# Altium PCB Stm32f103电机驱动板.PcbDoc
Units mil, origin at the board's own origin, x right, y up, seen from the top; angles counter-clockwise.
Board outline 1995.08 x 1945.04 mil, 4 copper layers (Top Layer, GND, VCC, Bottom Layer), stack 23.756 mil thick; 45 components, 46 nets, 210 pads, 258 vias.
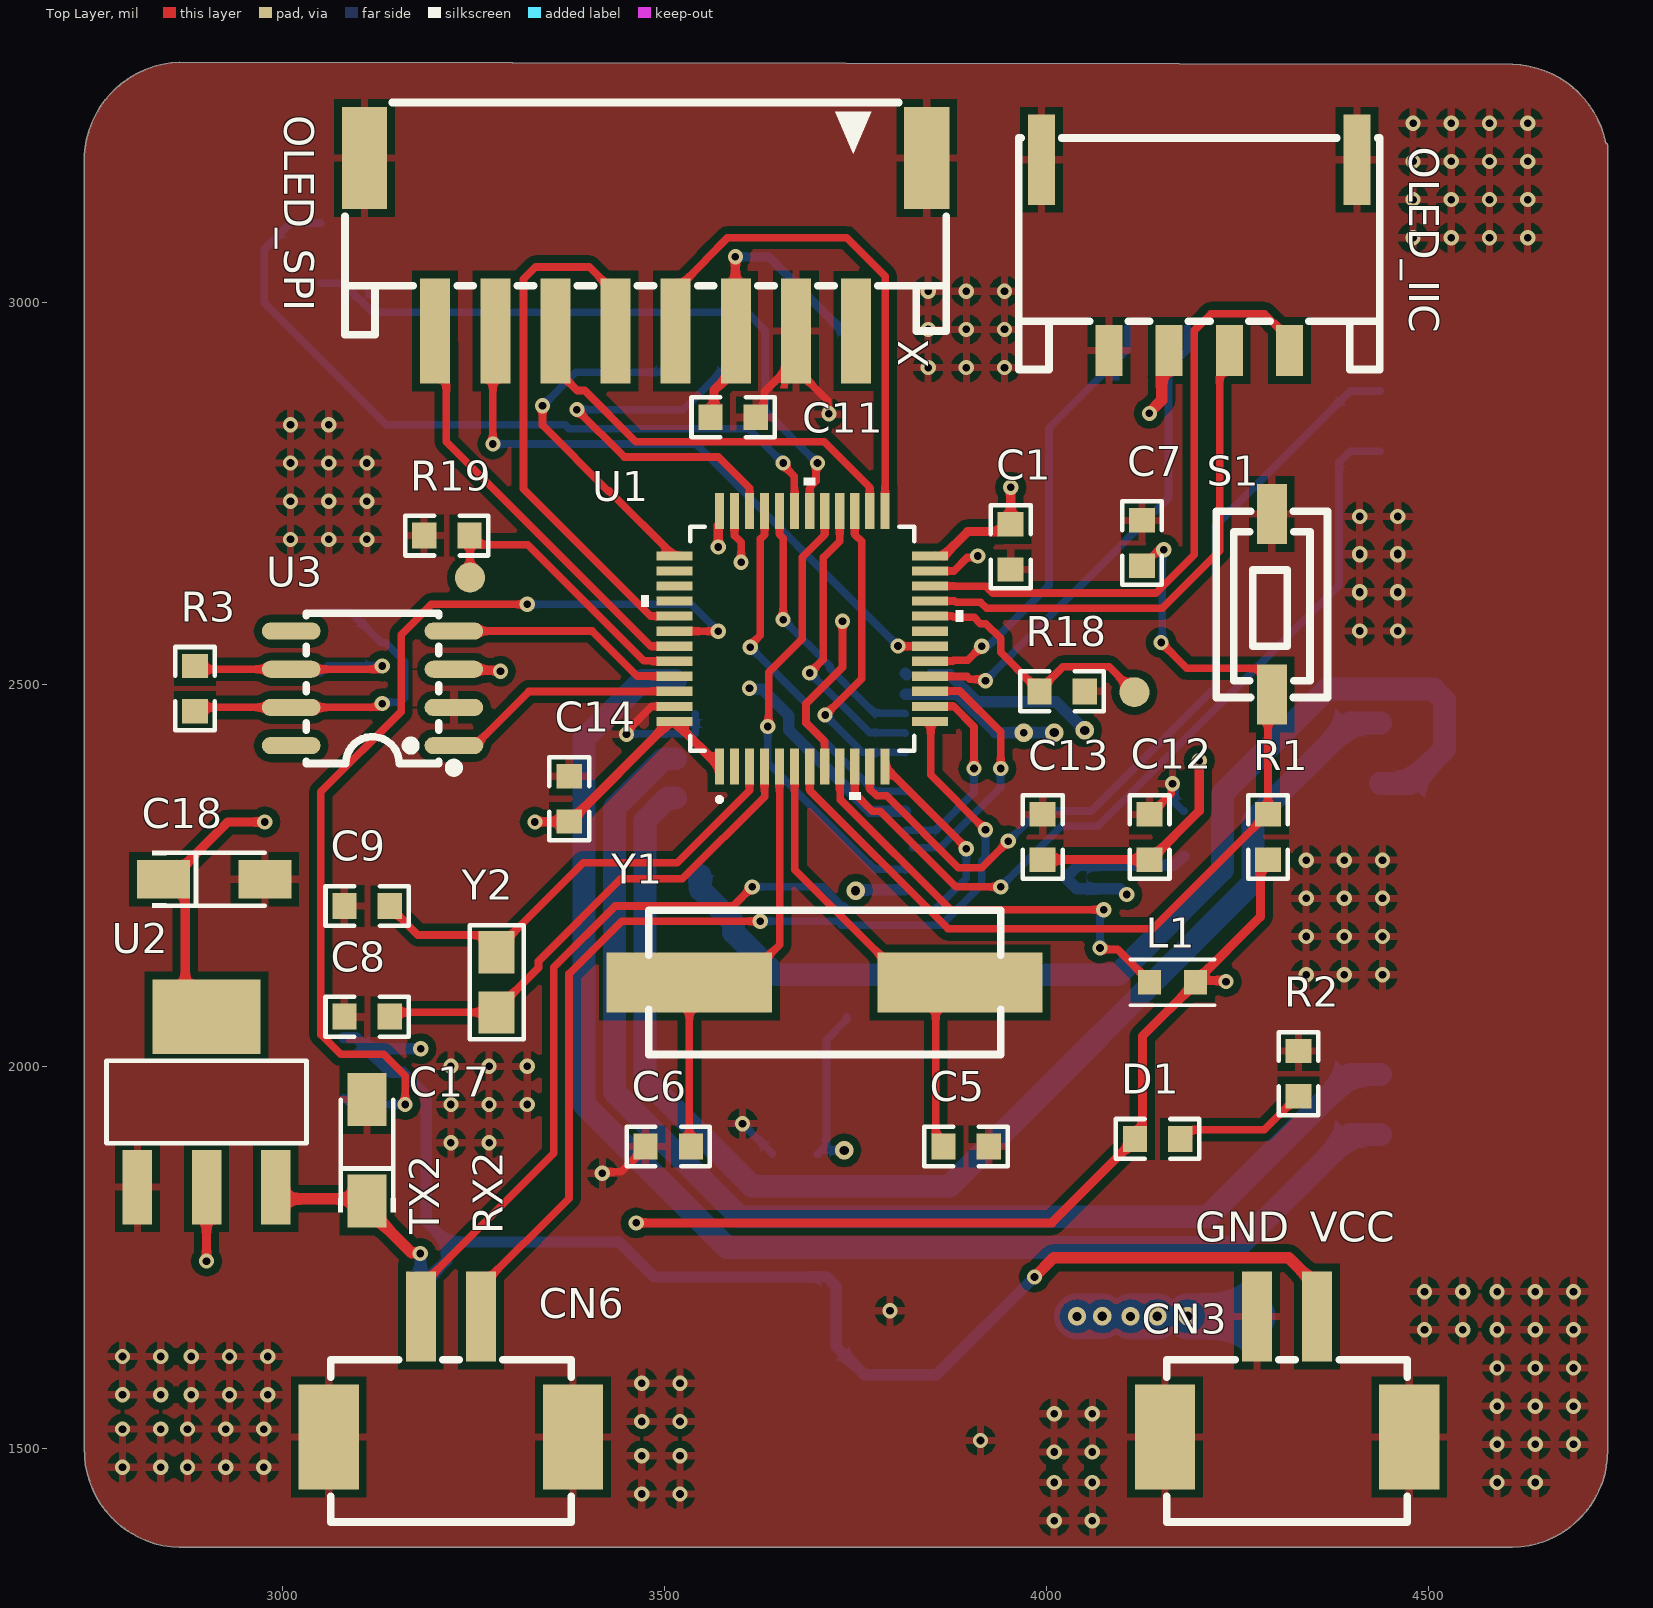
[diagram p0: Top Layer view]
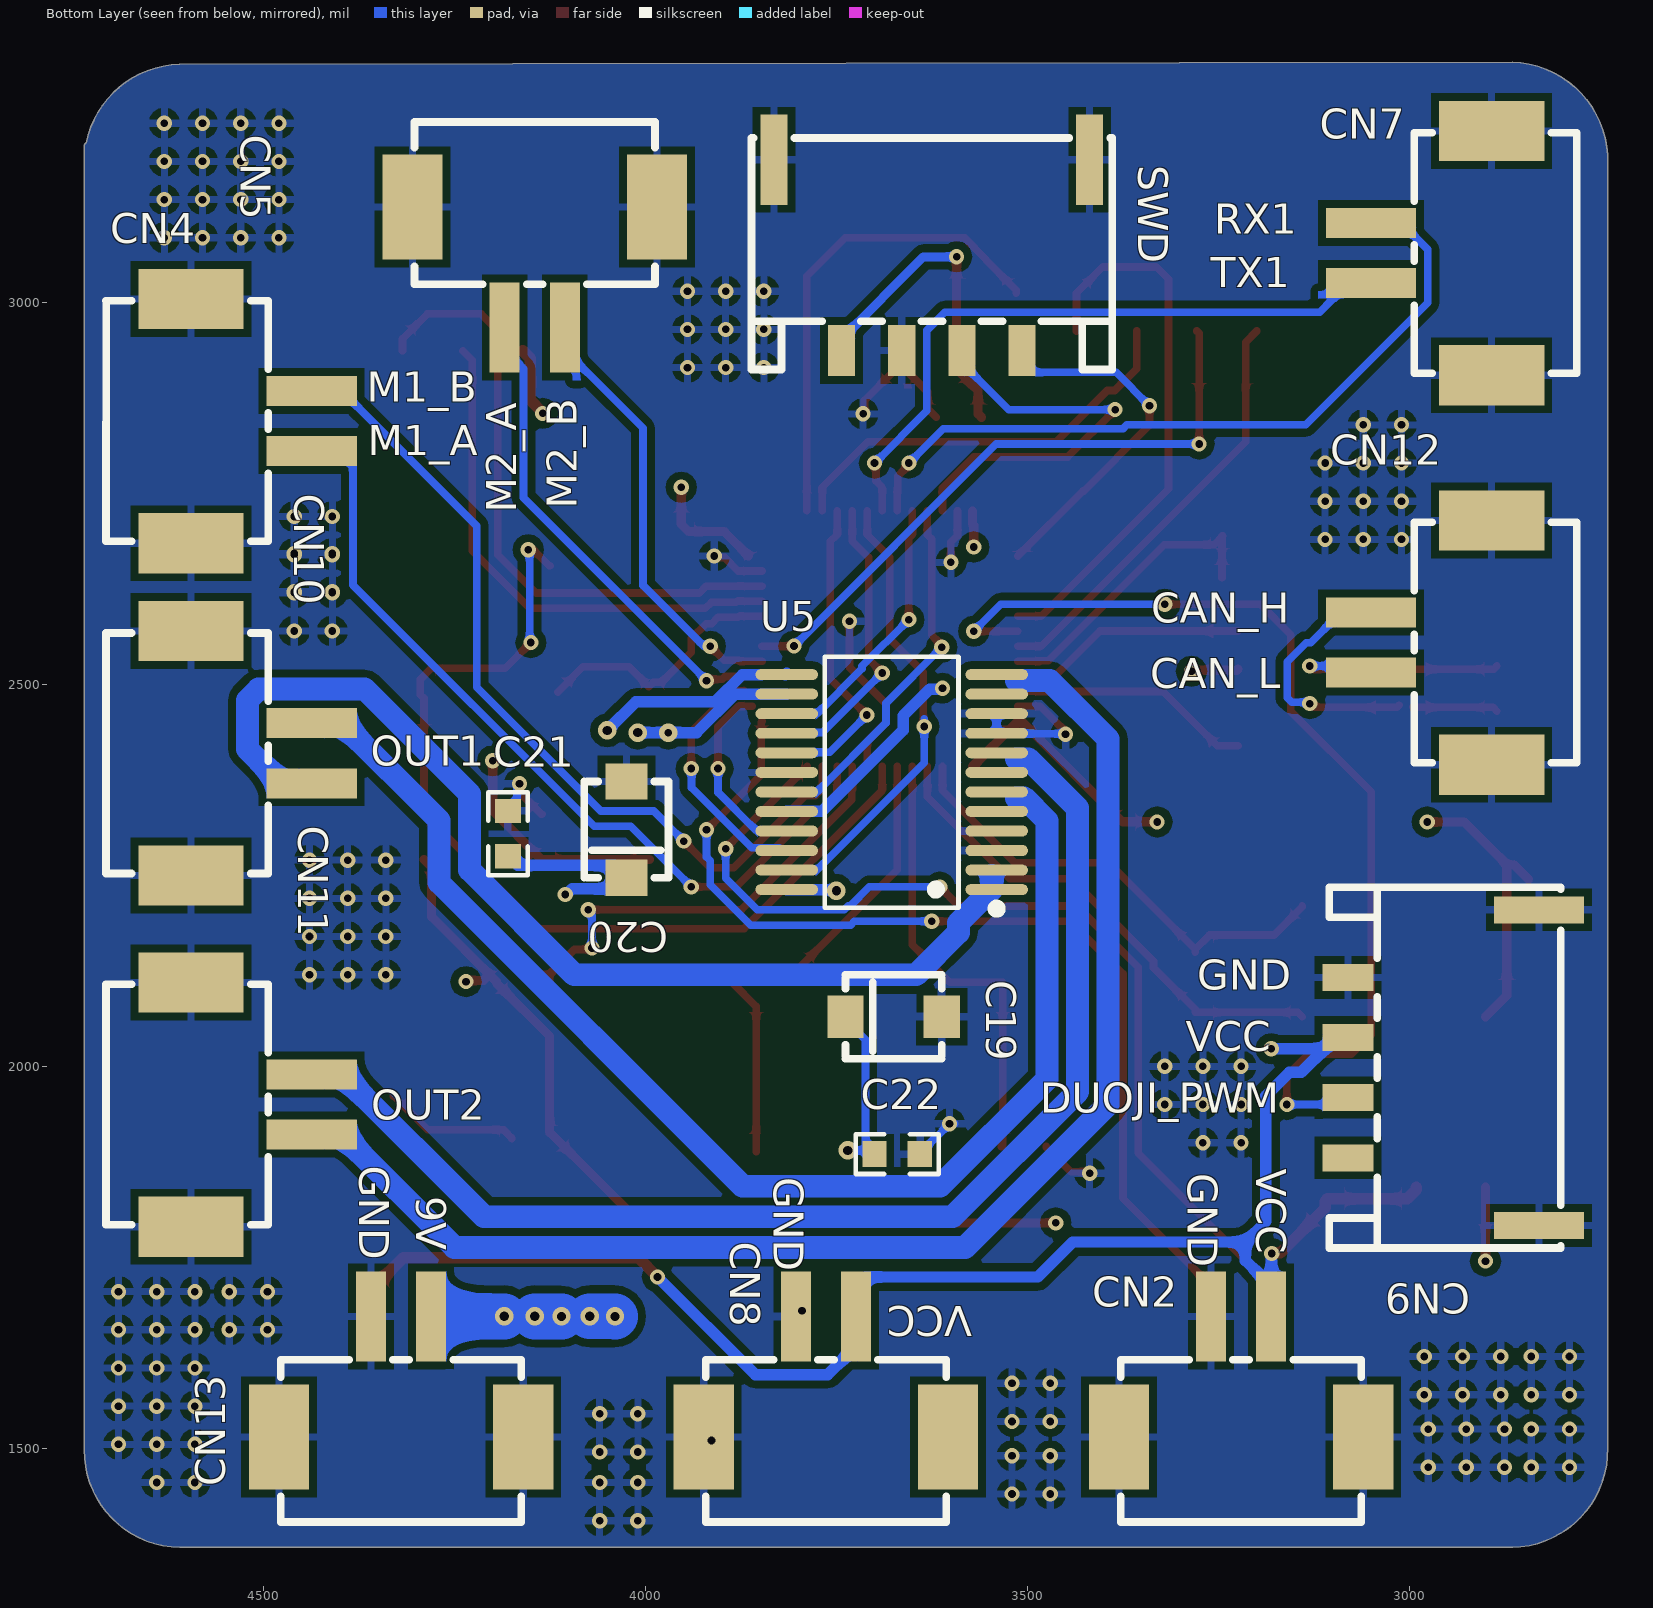
[diagram p1: Bottom Layer view, seen from below]
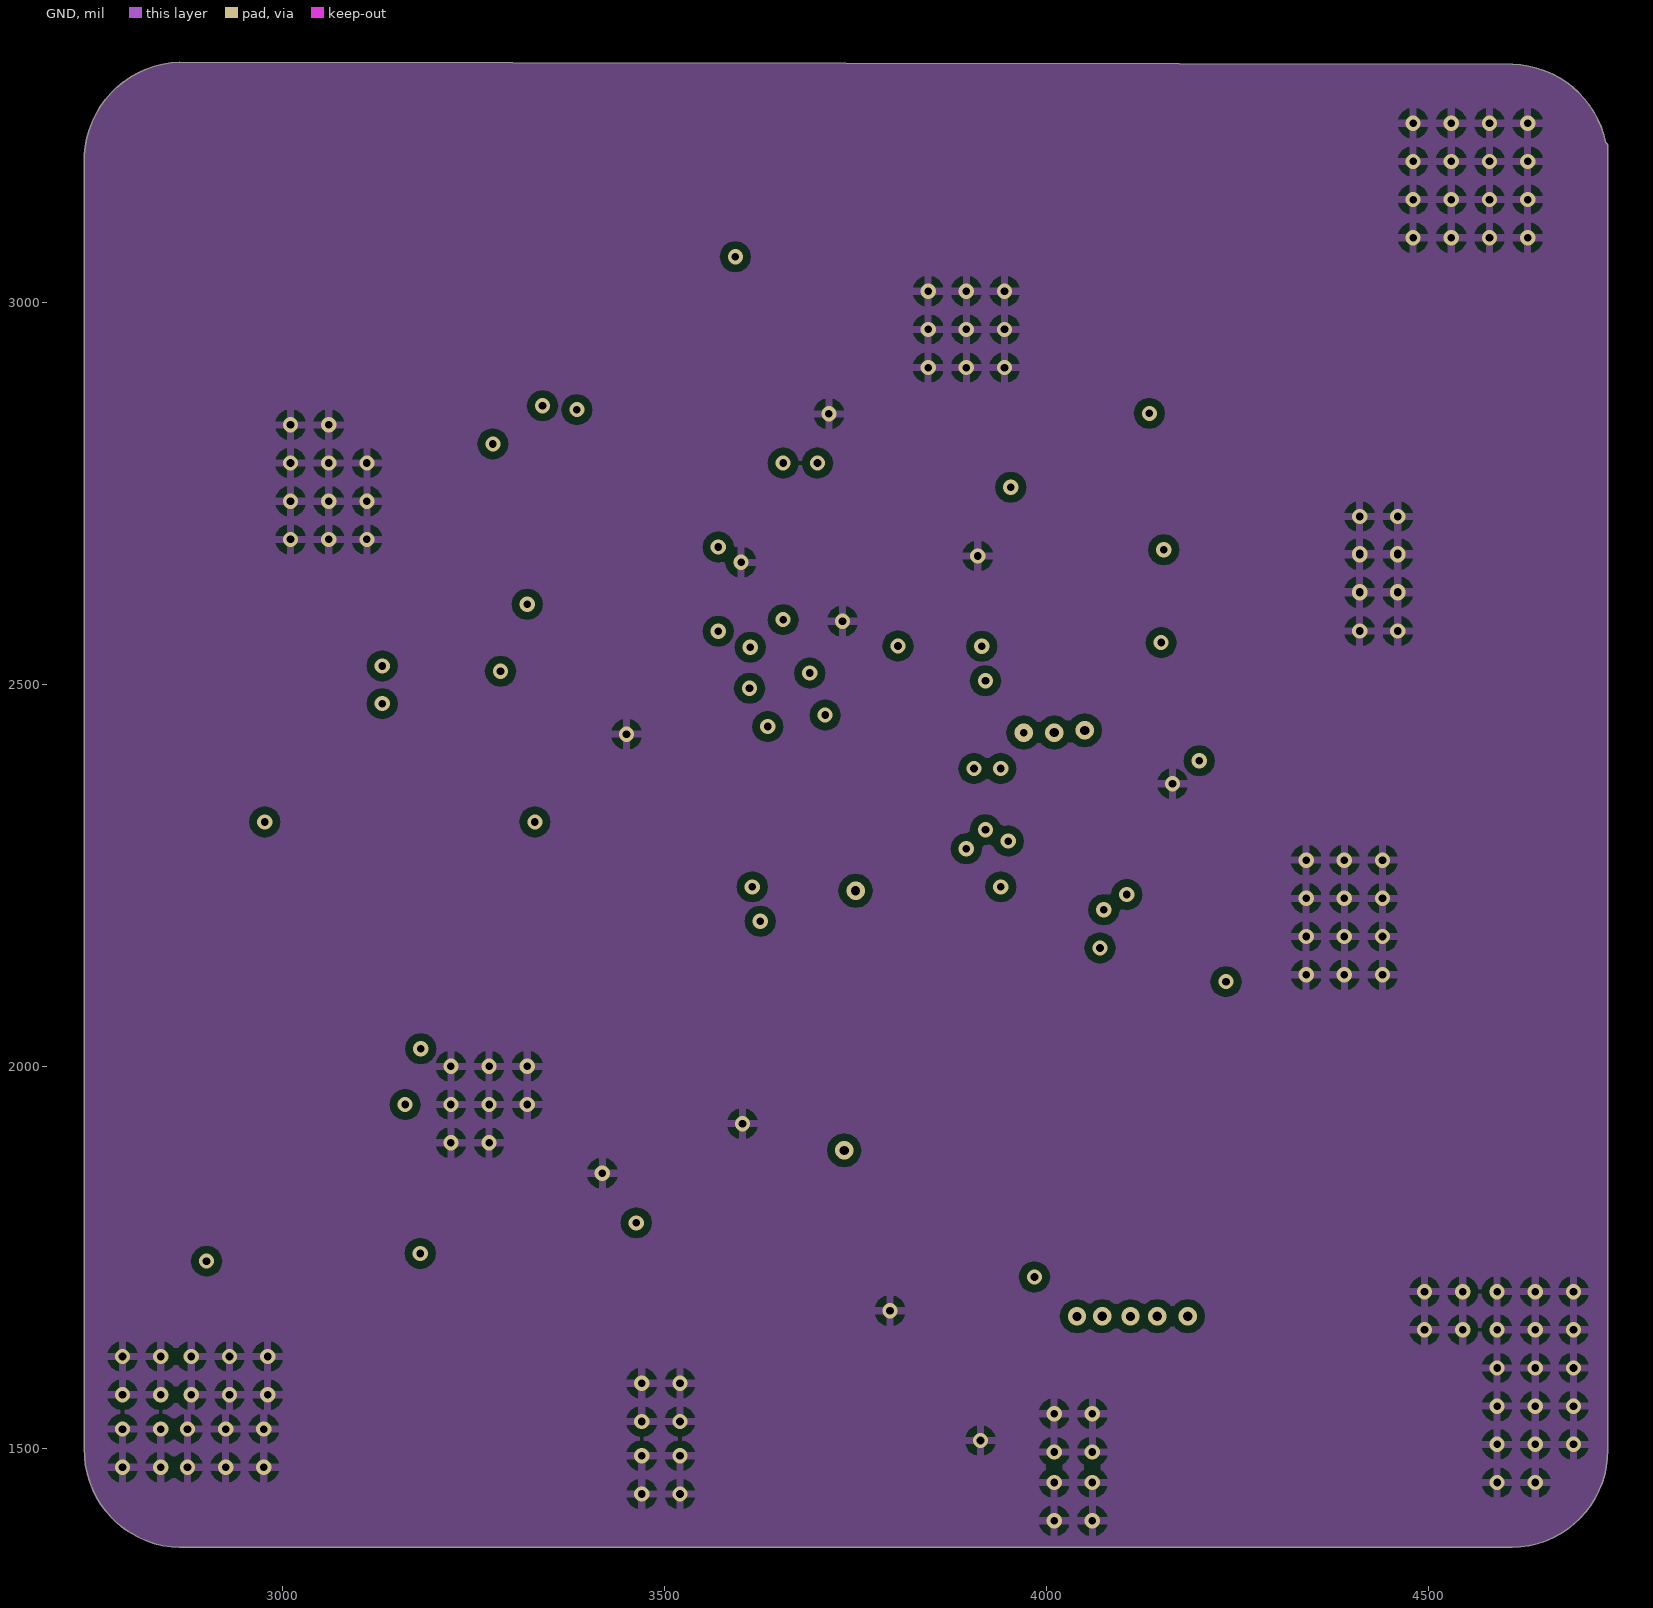
[diagram p2: GND]
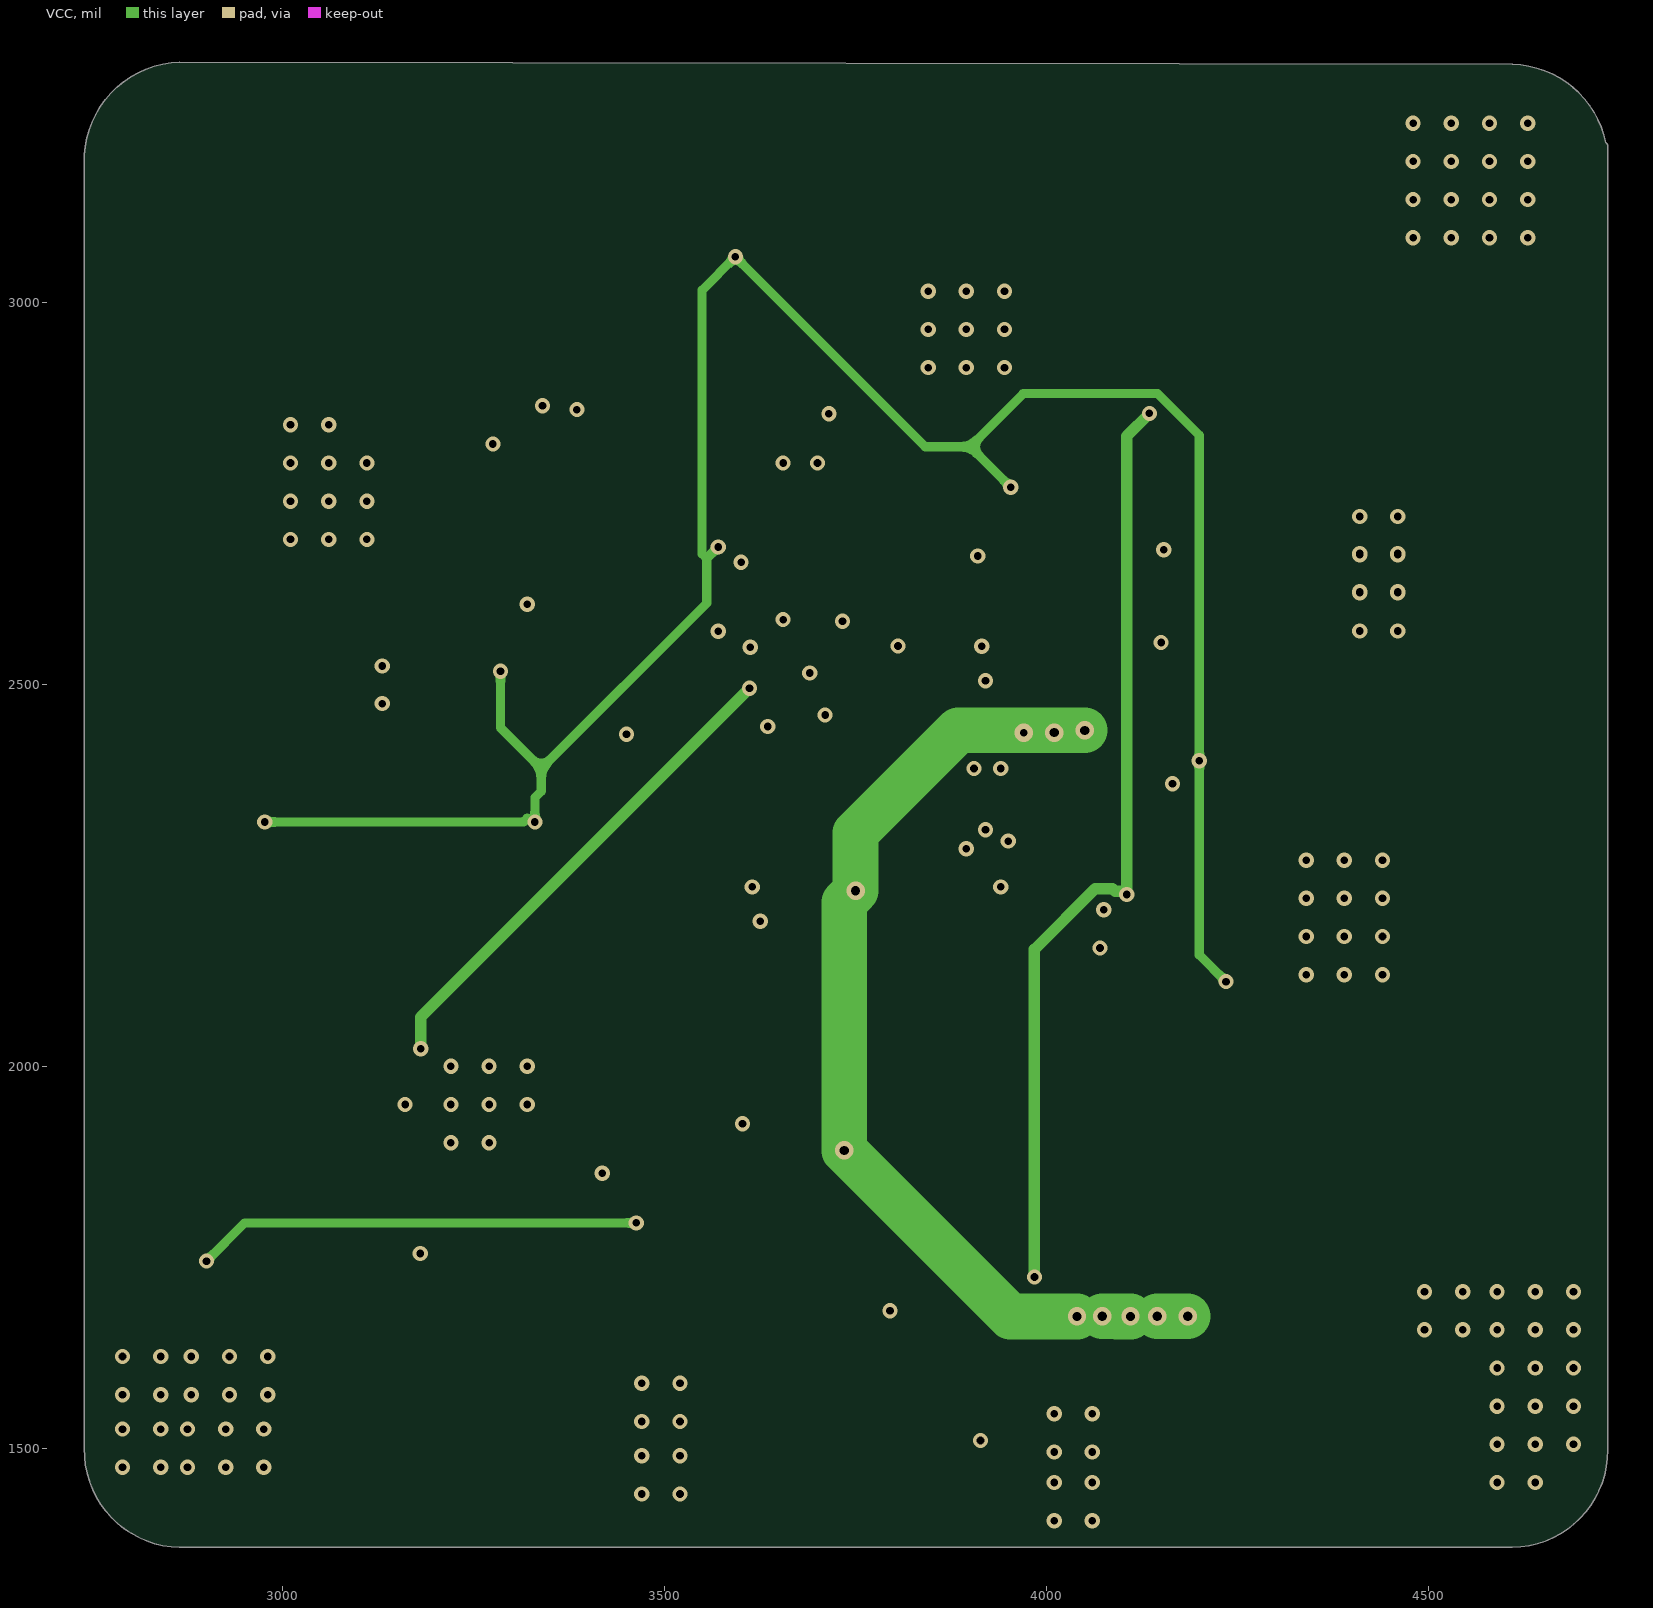
[diagram p3: VCC]

## Layer stack, top to bottom
Top Solder: solder mask 0.4, Solder Resist, Dk 3.5
Top Layer: signal copper 1.4
Dielectric 2: prepreg 2.8, PP-006, Dk 4.1
GND: signal copper 1.3779
Dielectric 1: dielectric 12.6, FR-4, Dk 4.8
VCC: signal copper 1.3779
Dielectric 3: prepreg 2.8, PP-006, Dk 4.1
Bottom Layer: signal copper 1.4
Bottom Solder: solder mask 0.4, Solder Resist, Dk 3.5

## Board outline
2739.98,1500 2739.98,1500.05 2739.99,3182.12 cw(c2868.9,3186.11) 2864.84,3315.02 cw(c2865,3310.01) 2865.04,3315.02 4610,3312.18 cw(c4609.99,3307.17) 4610.13,3312.18 cw(c4606.41,3183.58) 4732.45,3209.37 cw(c4730,3205) 4735.02,3205 4735.02,3187.23 cw(c4606.41,3183.58) 4735.07,3183.58 cw(c4606.41,3183.58) 4735.02,3179.93 4735.02,1500.05 cw(c4607.5,1497.5) 4735.04,1497.5 cw(c4607.5,1497.5) 4610.1,1369.99 cw(c4610,1375) 4610,1369.98 2865.03,1369.98 cw(c2865,1375) 2864.9,1369.99 cw(c2867.5,1497.5) 2739.98,1500.05 cw(c2867.5,1497.5)

## Design rules (kind name [scope] priority, off if disabled: settings)
Clearance [All] p1: gap=10 ignorepadtopadclearanceinfootprint=FALSE except(0: Arc-Hole Track-Hole SMDPad-Hole THPad-Hole Via-Hole Fill-Hole Poly-Hole Region-Hole Text-Hole)
PolygonConnect [All] p1: connectstyle=Relief reliefconductorwidth=10 reliefentries=4 polygonreliefangle="90 Angle" airgapwidth=10
RoutingVias [All] p1: holewidth=10 width=20 viastyle="Through Hole" minholewidth=10 minwidth=20 maxholewidth=28 maxwidth=50
SolderMaskExpansion [All] p1: expansion=4
Width [All] p1: maxlimit=80 minlimit=8 preferedwidth=10
30 further rules are at their usual default settings.

## Classes and differential pairs
component class 外围接口: CN2 CN3 CN4 CN5 CN6 CN7 CN8 CN9 CN10 CN11 CN12 CN13 OLED_IIC SWD
component class 主控: C1 C5 C6 C7 C8 C9 C11 C12 C13 C14 C17 C18 C19 C20 C21 C22 D1 L1 OLED_SPI R1 R2 R3 R18 R19 S1 U1 U2 U3 U5 Y1 Y2

## Components (designator, comment, footprint, x,y, rotation, side; value= is the part's Value field where it differs from the comment)
C1 "Cap" R0603 3947.18,2644.33 r90 top value=100nF
C5 "Cap" R0603 3930.67,1889.13 r180 top value=20pF
C6 "Cap" R0603 3468.64,1900.87 r0 top value=20pF
C7 "Cap" R0603 4130.87,2721.36 r270 top value=10uF
C8 "Cap" R0603 3074.33,2070.87 r0 top value=10pF
C9 "Cap" R0603 3074.33,2215.87 r0 top value=10pF
C11 "Cap" R0603 3625.67,2844.13 r180 top value=100nF
C12 "Cap" R0603 4140.87,2336.36 r270 top value=4.7uF
C13 "Cap" R0603 4000.87,2336.36 r270 top value=100nF
C14 "Cap" R0603 3380.87,2386.36 r270 top value=100nF
C17 "Cap Pol1" CAP-SMD_L3.2-W1.6-RD 3110,1890 r270 top value=10UF
C18 "Cap Pol1" CAP-SMD_L3.2-W1.6-RD 2910,2245 r180 top value=10UF
C19 "Cap" CAP-SMD_L3.2-W2.8 3675,2065 r180 bottom value=10uF
C20 "Cap" CAP-SMD_L3.2-W2.8 4025,2310 r90 bottom value=10uF
C21 "Cap" R0603 4185.87,2268.64 r90 bottom value=0.1uF
C22 "Cap" R0603 3706.36,1890.87 r180 bottom value=0.1uF
CN2 "PH2.0-2P" CONN-SMD_PH2.0-1X2PW 3220,1565 r0 bottom
CN3 "PH2.0-2P" CONN-SMD_PH2.0-1X2PW 4315,1565 r180 top
CN4 "PH2.0-2P" CONN-SMD_PH2.0-1X2PW 4544.68,2845 r90 bottom
CN5 "PH2.0-2P" CONN-SMD_PH2.0-1X2PW 4145,3075 r180 bottom
CN6 "PH2.0-2P" CONN-SMD_PH2.0-1X2PW 3220,1565 r180 top
CN7 "PH2.0-2P" CONN-SMD_PH2.0-1X2PW 2942.2,3065 r270 bottom
CN8 "PH2.0-2P" CONN-SMD_PH2.0-1X2PW 3763.7,1565 r0 bottom
CN9 "PH2.0-4PWB卧式" CONN-SMD_PH2.0-4PWB 2942.2,1998.31 r270 bottom
CN10 "PH2.0-2P" CONN-SMD_PH2.0-1X2PW 4544.69,2410 r90 bottom
CN11 "PH2.0-2P" CONN-SMD_PH2.0-1X2PW 4544.69,1950 r90 bottom
CN12 "PH2.0-2P" CONN-SMD_PH2.0-1X2PW 2942.2,2555 r270 bottom
CN13 "PH2.0-2P" CONN-SMD_PH2.0-1X2PW 4320,1565 r0 bottom
D1 "LED0" R0603 4109.33,1910.87 r0 top
L1 "GZ1608D601TF" L0603 4165,2110 r0 top
OLED_IIC "PH2.0-4PWB卧式" CONN-SMD_PH2.0-4PWB 4200,3075 r0 top (schematic designator CN14)
OLED_SPI "PH2.0-8P" CONN-SMD_X2016WRS-08-9TSW 3475,3080.58 r180 top (schematic designator CN15)
R1 "Res1" R0603 4295.87,2336.36 r270 top value=10K
R2 "Res1" R0603 4324.13,1954.33 r90 top value=2K2
R3 "120R/NC" R0603 2879.13,2458.64 r90 top value=22R
R18 "Res1" R0603 4056.36,2485.23 r180 top value=100k
R19 "Res1" R0603 3250.67,2689.13 r180 top value=100K
S1 "SW-PB" SW-SMD_L6.1-W3.6-LS7.1 4295,2605 r90 top
SWD "PH2.0-4PWB卧式" CONN-SMD_PH2.0-4PWB 3625,3075 r180 bottom (schematic designator CN1)
U1 "STM32F103C8T6" LQFP48-7x7mm 3680,2560 r90 top
U2 "AMS1117-3.3V" SOT-223-4_L6.5-W3.5-P2.30-LS7.0-BR 15897,20481.73 r270 top
U3 "SN65HVD232D" SOIC-8_L5.0-W4.0-P1.27-LS6.0-BL 3160,2520 r90 top
U5 "TB6612FNG(O,C,8,EL" SSOP-24_L8.4-W5.8-P0.65-LS7.8-BL 20856.38,-15091.91 r90 bottom
Y1 "XTAL" OSC-SMD_L11.4-W4.5-LS12.5 3709.53,2110 r0 top
Y2 "32.768KHZ" 3215 3280,2110 r90 top

## Footprints (in the part's own frame and the unit in brackets; to place one, negate y for a bottom-side part, rotate by r counter-clockwise, add the part's x,y. Pads: shape width x height; smd on the part's side, far side on the other; paste and mask are expansions set on the pad)
3215 [mm] "3215"
  rect 1.4x1.2 smd: 1(-1,0) 2(1,0)
  silkscreen extent -1.9,-0.9 1.9,0.9
CAP-SMD_L3.2-W1.6-RD [mil]
  rect 69.19x51.02 smd: 1(66.39,0) 2(-66.39,0)
  silkscreen extent -66,-37 81,37
CAP-SMD_L3.2-W2.8 [mm]
  rect 1.2x1.4 smd: 1(-1.6,0) 2(1.6,0)
  silkscreen extent -1.6,-1.4 1.6,1.4
CONN-SMD_PH2.0-1X2PW [mm]
  rect 1x3 smd: 1(-1,-2.733) 2(1,-2.733)
  rect 2x3.5 smd: 3(4.064,1.278) 4(-4.064,1.278)
  silkscreen extent -4,-1.29 4,4.11
CONN-SMD_PH2.0-4PWB [mm]
  rect 0.9x1.7 smd: 1(-3,-3.5) 2(-1,-3.5) 3(1,-3.5) 4(3,-3.5)
  rect 0.9x3 smd: 5(5.25,2.85) 6(-5.25,2.85)
  silkscreen extent -6,-4.12 6,3.57
CONN-SMD_X2016WRS-08-9TSW [mm]
  rect 1x3.5 smd: 1(-7,2.989) 2(-5,2.989) 3(-3,2.989) 4(-1,2.989) 5(1,2.989) 6(3,2.989) 7(5,2.989) 8(7,2.989)
  rect 1.5x3.4 smd: 9(9.35,-2.761) 10(-9.35,-2.761)
  silkscreen extent -10,-4.61 10,3.11
L0603 [mil] "L0603"
  rect 30x32 smd: 1(-30,0) 2(30,0)
  silkscreen extent -55,-30 55,30
LQFP48-7x7mm [mil]
  rect 47x12 smd paste+0 mask+0: 1(-167.32,108.27) 2(-167.32,88.58) 3(-167.32,68.9) 4(-167.32,49.21) 5(-167.32,29.53) 6(-167.32,9.84) 7(-167.32,-9.84) 8(-167.32,-29.53) 9(-167.32,-49.21) 10(-167.32,-68.9) 11(-167.32,-88.58) 12(-167.32,-108.27) 25(167.32,-108.27) 26(167.32,-88.58) 27(167.32,-68.9) 28(167.32,-49.21) 29(167.32,-29.53) 30(167.32,-9.84) 31(167.32,9.84) 32(167.32,29.53) 33(167.32,49.21) 34(167.32,68.9) 35(167.32,88.58) 36(167.32,108.27)
  rect 12x47 smd paste+0 mask+0: 13(-108.27,-167.32) 14(-88.58,-167.32) 15(-68.9,-167.32) 16(-49.21,-167.32) 17(-29.53,-167.32) 18(-9.84,-167.32) 19(9.84,-167.32) 20(29.53,-167.32) 21(49.21,-167.32) 22(68.9,-167.32) 23(88.58,-167.32) 24(108.27,-167.32) 37(108.27,167.32) 38(88.58,167.32) 39(68.9,167.32) 40(49.21,167.32) 41(29.53,167.32) 42(9.84,167.32) 43(-9.84,167.32) 44(-29.53,167.32) 45(-49.21,167.32) 46(-68.9,167.32) 47(-88.58,167.32) 48(-108.27,167.32)
  silkscreen extent -214,-211 211,211, body extent -177,-177 177,177, height 63
OSC-SMD_L11.4-W4.5-LS12.5 [mm]
  rect 5.5x2 smd: 1(-4.5,0) 2(4.5,0)
  silkscreen extent -5.85,-2.4 5.85,2.4
R0603 [mil]
  rect 31.75x34.02 smd: 1(6.36,-5.87) 2(65.67,-5.87)
  silkscreen extent -19,-32 91,20
SOIC-8_L5.0-W4.0-P1.27-LS6.0-BL [mil]
  oval 22.38x76.78 smd: 1(-99.98,-63.89) 2(-49.98,-63.89) 3(0.02,-63.89) 4(50.02,-63.89) 5(50.02,149.11) 6(0.02,149.11) 7(-49.98,149.11) 8(-99.98,149.11)
  silkscreen extent -135,-70 73,129
SOT-223-4_L6.5-W3.5-P2.30-LS7.0-BR [mm]
  rect 2.47x0.98 smd: 1(473.455,-332.424) 2(473.455,-330.124) 3(473.455,-327.824)
  rect 2.47x3.6 smd: 4(467.785,-330.124)
  silkscreen extent 469.25,-333.45 471.99,-326.8
SSOP-24_L8.4-W5.8-P0.65-LS7.8-BL [mil]
  oval 14.33x81.97 smd: 1(17323.37,-17316.26) 2(17348.96,-17316.26) 3(17374.55,-17316.26) 4(17400.14,-17316.26) 5(17425.73,-17316.26) 6(17451.32,-17316.26) 7(17476.91,-17316.26) 8(17502.51,-17316.26) 9(17528.1,-17316.26) 10(17553.69,-17316.26) 11(17579.28,-17316.26) 12(17604.87,-17316.26) 13(17604.87,-17041.38) 14(17579.28,-17041.38) 15(17553.69,-17041.38) 16(17528.1,-17041.38) 17(17502.51,-17041.38) 18(17476.91,-17041.38) 19(17451.32,-17041.38) 20(17425.73,-17041.38) 21(17400.14,-17041.38) 22(17374.55,-17041.38) 23(17348.96,-17041.38) 24(17323.37,-17041.38)
  silkscreen extent 17292,-17322 17629,-17091
SW-SMD_L6.1-W3.6-LS7.1 [mm]
  rect 2x1 smd: 1(-3,0) 2(3,0)
  silkscreen extent -3.1,-1.85 3.1,1.85

## Part data
C1 C5 C6 C7 C8 C9 C11 C12 C13 C14 C19 C20 C21 C22: "Capacitor", LatestRevisionDate=17-Jul-2002, LatestRevisionNote="Re-released for DXP Platform.", PackageDescription="Radial Cap, Thru-Hole; 2 Leads; 0.3 in Pin Spacing", PackageReference=RAD-0.3, Published=8-Jun-2000, Publisher="Altium Limited"
C17 C18: "Polarized Capacitor (Radial)", LatestRevisionDate=17-Jul-2002, LatestRevisionNote="Re-released for DXP Platform.", PackageDescription="Polarized Capacitor (Radial); 2 Leads", PackageReference=RB7.6-15, Published=8-Jun-2000, Publisher="Altium Limited"
D1: "Typical INFRARED GaAs LED", LatestRevisionDate=08-Jul-2005, LatestRevisionNote="Mech Layer 1 removed.", PackageDescription="LED; 2 Leads", PackageReference=LED-0, Published=8-Jun-2000, Publisher="Altium Limited"
L1: library part INDUCTOR_FERRITE, "IND FER BEAD 120 OHM@100MHZ 0.5A 25% 0402"
R1 R2 R18 R19: "Resistor", LatestRevisionDate=17-Jul-2002, LatestRevisionNote="Re-released for DXP Platform.", PackageDescription="Axial Device, Thru-Hole; 2 Leads; 0.3 in Pin Spacing", PackageReference=AXIAL-0.3, Published=8-Jun-2000, Publisher="Altium Limited"
R3: library part 电阻-0402, "Resistor"
S1: "Switch", LatestRevisionDate=17-Jul-2002, LatestRevisionNote="Re-released for DXP Platform.", PackageDescription="Switch; 2 Leads", PackageReference=SPST-2, Published=24-Mar-1999, Publisher="Altium Limited"
U1: "No Description Available", Built_By=EMA_UL_Team, Copyright="Copyright (C) 2018 Accelerated Designs. All rights reserved", Manufacturer_Part_Number=STM32F103C8T6, RefDes=RefDes, SourceLibrary=Updates_to_database_2020-10-19, Type=DEV, Vendor=STMicroelectronics
U3: Manufacturer="Texas Instruments", Manufacturer Part Number=SN65HVD232DR, Operating Temperature="-40°C ~ 85?", Package / Case="8-SOIC (0.154\", 3.90mm Width)", Supplier Device Package=8-SOIC, Supplier Part Number 1=296-26344-2-ND, Voltage - Supply="3 V ~ 3.6 V", Category="Integrated Circuits (ICs)", ComponentLink1Description=http://www.ti.com/lit/ds/symlink/sn65hvd230.pdf, ComponentLink1URL=http://www.ti.com/lit/ds/symlink/sn65hvd230.pdf, Data Rate=1Mbps, Duplex=Half, Mounting Type="Surface Mount", Number of Drivers/Receivers=1/1, Packaging="Tape & Reel (TR)", Part Status=Active, Pricing 1="2500=0.84375 (USD)", Pricing 2="1=2.05, 10=1.842, 100=1.4809, 500=1.21668, 1000=1.00811 (USD)", Protocol=CAN, ROHS="RoHS Compliant", Stock=5000, Supplier 1=Digi-Key, Supplier 2=Digi-Key, Supplier Part Number 2=296-26344-1-ND, Type=Transceiver
Y1: "Crystal Oscillator", LatestRevisionDate=17-Jul-2002, LatestRevisionNote="Re-released for DXP Platform.", PackageDescription="Crystal, Thru-Hole; 2 Leads; Body 3.1 x 8.2 mm (Dia.xH)", PackageReference=R38, Published=8-Jun-2000, Publisher="Altium Limited"
Y2: library part CRYSTAL, "XTAL 32.768KHZ 7PF 20PPM -- SMT"

## Free pads (board coordinates)
  round 39.37 smd: 2(3245,2640) 3(4115,2490)

## Via types
v1: diameter 20, hole 10, Top Layer to Bottom Layer, 248 vias
v2: diameter 24, hole 12, Top Layer to Bottom Layer, 9 vias
v3: diameter 24, hole 10, Top Layer to Bottom Layer, 1 vias

## Nets (pads, with @x,y where several pads share a name; then routed paths per layer and width w, separated by ;. In a path a pad name is that pad's centre, name@x,y a point inside that pad or via, vN(x,y) a via of type N, cw(c..) or ccw(c..) an arc to the next point about the centre after c; other vN are vias at no path point)
9V: C19.1 C22.1 CN13.1 U5.13 U5.14 U5.24 | length 2145.1
  VCC w60: v2(4040,1672.6) 3952.4,1672.6 v2(3735,1890) 3735,2215 v2(3750,2230) 3750,2305.71 3884.29,2440 v2(4050,2440) ; v2(4072.91,1672.76) 4092,1672.76 4092.15,1672.6 v2(4110,1672.6) ; v2(4145,1672.76) v2(4185,1672.76)
  Bottom Layer w10: C22.1 C22.1@3705,1890 ; v2(3735,1890) C22.1@3705,1890 ; C19.1 3738,2061.06 3711.88,2034.94 3711.88,1896.89 3710.88,1896.89 3705,1891.01 C22.1@3705,1890
  Bottom Layer w15: v2(3750,2230) 3751.12,2231.12 3814.67,2231.12 U5.24 ; U5.14 3882.68,2487.36 3933.03,2437.01 v2(4010,2437.01) ; U5.13@3815,2514.95 U5.13@3817,2512.95 ; U5.13@3848.48,2512.62 3873.49,2512.62 3908.65,2477.46 4012.54,2477.46 v2(4050,2440)
  Bottom Layer w60: v2(4040,1672.6) 4040.15,1672.76 v2(4072.91,1672.76) ; v2(4110,1672.6) 4144.85,1672.6 v2(4145,1672.76) ; v2(4185,1672.76) 4185.15,1672.6 CN13.1@4270,1672.6
  other v3: 3970,2437.01
CAN_H: CN12.1 R3.1 U3.7 | length 448.6
  Top Layer w10: R3.1 2890.02,2470.02 U3.7@2995,2470.02 ; U3.7@3013.19,2472.7 3015.87,2470.02 3122.31,2470.02 3127.29,2475 v1(3130,2475)
  Bottom Layer w10: CN12.1 3089.18,2594.36 3128.7,2554.84 3134.83,2554.84 3159.66,2530.01 3159.66,2482.93 3153.64,2476.91 3131.91,2476.91 v1(3130,2475)
CAN_L: CN12.2 R3.2 U3.6 | length 332.3
  Top Layer w10: R3.2 2889.29,2520.02 3123,2520.02 3127.29,2524.31 v1(3130,2524.31)
  Bottom Layer w10: CN12.2 3058.5,2524.31 v1(3130,2524.31)
CAN_RX: U1.45 U3.4 | length 313.3
  Top Layer w10: U3.4 3405.22,2570.02 3464.14,2511.1 3481.33,2511.1 3481.65,2510.79 U1.45
CAN_TX: U1.46 U3.1 | length 318.2
  Top Layer w10: U3.1 3251.09,2420.02 3321.86,2490.79 3481.33,2490.79 3481.65,2491.1 U1.46
CS: OLED_SPI.8 U1.43 | length 560.7
  Top Layer w10: OLED_SPI.8 3214.09,2948.24 3214.09,2817.71 3481.65,2550.16 U1.43
D0: OLED_SPI.4 U1.25 | length 635.6
  Top Layer w10: OLED_SPI.4@3514.37,3012.13 3514.37,3016.27 3553.57,3055.47 3553.57,3056.35 3582.22,3085 3738.31,3085 3788.58,3034.73 U1.25@3788.58,2727.32
D1: OLED_SPI.5 U1.41 | length 732.2
  Top Layer w10: OLED_SPI.5 3435.63,3012.13 3400.95,3046.82 3330.99,3046.82 3315,3030.83 3315,2756.18 3481.65,2589.53 3494.18,2589.53 U1.41
DC: OLED_SPI.7 U1.18 | length 831.2
  Top Layer w10: v1(3275.05,2815) 3275.05,2959.82 OLED_SPI.7 ; v1(3805.44,2550.44) 3805.72,2550.16 U1.18
  Bottom Layer w10: v1(3275.05,2815) 3540.88,2815 v1(3805.44,2550.44)
DUOJI_PWM: CN9.3 U1.42 | length 1324.5
  Top Layer w10: v1(3160,1950) 3160,1987.71 3132.01,2015.7 3075.89,2015.7 3049.81,2041.78 3049.81,2359.46 3155,2464.64 3155,2565.37 3194.63,2605 v1(3320,2605) ; U1.42 v1(3570,2569.84)
  Bottom Layer w10: CN9.3 3088.94,1950 v1(3160,1950) ; v1(3320,2605) 3534.84,2605 v1(3570,2569.84)
GND: C1.1 C5.1 C6.1 C7.1 C8.1 C9.1 C11.1 C12.1 C13.1 C14.1 C17.2 C18.2 C19.2 C20.2 C21.2 C22.2 CN2.2 CN2.3 CN2.4 CN3.2 CN3.3 CN3.4 CN4.3 CN4.4 CN5.3 CN5.4 CN6.3 CN6.4 CN7.3 CN7.4 CN8.2 CN8.3 CN9.1 CN9.5 CN9.6 CN10.3 CN10.4 CN11.3 CN11.4 CN12.3 CN12.4 CN13.2 CN13.3 CN13.4 OLED_IIC.1 OLED_IIC.5 OLED_IIC.6 OLED_SPI.2 OLED_SPI.9 OLED_SPI.10 R2.2 R18.1 R19.2 S1.2 SWD.2 SWD.5 SWD.6 U1.8 U1.23 U1.35 U1.47 U2.1 U3.2 U5.3 U5.4 U5.9 U5.10 U5.18 | length 1047.1
  Top Layer w10: v1@3420,1860 3421.91,1861.91 3443.05,1861.91 3475,1893.87 C6.1 ; v1(3450,2435) 3451.91,2436.91 3451.91,2440.27 3483.07,2471.42 U1.47 ; U1.35 3591.42,2694.86 3600,2686.28 v1(3600,2660) ; C11.1 3630.19,2860.88 3630.19,2883.07 3656.38,2909.26 3657.16,2909.26 3671.85,2923.95 OLED_SPI.2 3671.85,2913.71 3713.09,2872.47 3713.09,2856.32 v1(3715,2854.41) ; U1.8 3709.53,2420.47 3709.21,2420.79 3709.21,2425.43 3685,2449.64 3685,2474.64 3732.8,2522.44 v1(3732.8,2582.8) ; U1.23 3878.35,2648.58 3896.12,2666.35 3908.09,2666.35 v1(3910,2668.27) ; C12.1 4136.13,2330 4163.09,2356.95 4163.09,2368.09 v1(4165,2370)
  Bottom Layer w10: v1@3450.59,2435.59 3539.53,2435.59 U5.9 U5.10 ; v1@3595,1925 v1(3601.82,1925) 3640.69,1886.13 C22.2 ; v1(4165,2370) 4165,2367.29 4167.99,2364.3 4167.99,2345.19 4178.87,2334.31 C21.2
  other v1: 4010,1405 4060,1405 3470,1440 3520,1440 4010,1455 4060,1455 4590,1455 4640,1455 2790,1475 2840,1475 2875,1475 2925,1475 2925,1475 2975,1475 3470,1490 3520,1490 4010,1495 4060,1495 4590,1505 4590,1505 4640,1505 4640,1505 4640,1505 4690,1505 3913.46,1510 2790,1525 2840,1525 2875,1525 2925,1525 2925,1525 2975,1525 3470,1535 3520,1535 4010,1545 4060,1545 4590,1555 4590,1555 4640,1555 4640,1555 4640,1555 4690,1555 2790,1570 2840,1570 2880,1570 2930,1570 2930,1570 2980,1570 3470,1585 3520,1585 4590,1605 4590,1605 4640,1605 4640,1605 4640,1605 4690,1605 2790,1620 2840,1620 2880,1620 2930,1620 2930,1620 2980,1620 4495,1655 4545,1655 4590,1655 4590,1655 4640,1655 4640,1655 4640,1655 4640,1655 4690,1655 4690,1655 3795,1680 4495,1705 4545,1705 4590,1705 4640,1705 4640,1705 4690,1705 3418.31,1860 3220,1900 3270,1900 3220,1950 3220,1950 3270,1950 3270,1950 3270,1950 3320,1950 3220,2000 3270,2000 3270,2000 3320,2000 4340,2120 4390,2120 4390,2120 4440,2120 4340,2170 4340,2170 4390,2170 4390,2170 4390,2170 4390,2170 4440,2170 4440,2170 4340,2220 4340,2220 4390,2220 4390,2220 4390,2220 4390,2220 4440,2220 4440,2220 4340,2270 4390,2270 4390,2270 4440,2270 4410,2570 4460,2570 4410,2620 4460,2620 4410,2621.62 4460,2621.62 4410,2670 4460,2670 4410,2671.62 4460,2671.62 3010,2690 3060,2690 3060,2690 3110,2690 4410,2720 4460,2720 3010,2740 3010,2740 3060,2740 3060,2740 3060,2740 3060,2740 3110,2740 3110,2740 3010,2790 3010,2790 3060,2790 3060,2790 3060,2790 3110,2790 3010,2840 3060,2840 3845,2915 3895,2915 3895,2915 3945,2915 3845,2965 3845,2965 3895,2965 3895,2965 3895,2965 3895,2965 3945,2965 3945,2965 3845,3015 3895,3015 3895,3015 3945,3015 4480,3085 4530,3085 4580,3085 4630,3085 4480,3135 4480,3135 4530,3135 4530,3135 4530,3135 4580,3135 4580,3135 4580,3135 4630,3135 4630,3135 4480,3185 4480,3185 4530,3185 4530,3185 4530,3185 4530,3185 4580,3185 4580,3185 4580,3185 4580,3185 4630,3185 4630,3185 4480,3235 4530,3235 4530,3235 4580,3235 4580,3235 4630,3235
I2C_SCL: OLED_IIC.3 U1.21 | length 681.9
  Top Layer w10: U1.21 3880.32,2609.21 3881.63,2607.9 3913.47,2607.9 3921.55,2599.81 4151.51,2599.81 4226.65,2674.96 4226.65,2924.49 OLED_IIC.3
I2C_SDA: OLED_IIC.4 U1.22 | length 827.4
  Top Layer w10: U1.22 3920.75,2628.9 3929.83,2619.81 4143.22,2619.81 4193.35,2669.94 4193.35,2963.57 4215.44,2985.67 4285.39,2985.67 4318.11,2952.95 OLED_IIC.4
MOTO1_1: U1.14 U5.21 | length 253.1
  Top Layer w10: U1.14@3860,2471.53 3878.23,2471.53 3905,2444.77 v1(3905,2390)
  Bottom Layer w10: U5.21 3815.83,2309.06 3855.4,2309.06 3905,2358.65 v1(3905,2390)
MOTO1_2: U1.15 U5.22 | length 312.9
  Top Layer w10: U1.15@3870,2491.1 3870.43,2491.53 3886.52,2491.53 3940,2438.05 v1(3940,2390)
  Bottom Layer w10: U5.22@3825,2286.06 3860.69,2286.06 3939.63,2365 3939.63,2389.63 v1(3940,2390)
MOTO1_A: CN4.1 U1.10 | length 1104.7
  Top Layer w10: U1.10 3748.9,2357.29 3772.01,2334.18 3782.18,2334.18 3881.36,2235 v1(3940,2235)
  Bottom Layer w10: v1(3940,2235) 4019.37,2314.37 4067.06,2314.37 4383.02,2630.34 4383.02,2790.95 4397.71,2805.64 CN4.1
MOTO1_B: CN4.2 U1.11 | length 1123.1
  Top Layer w10: U1.11 3768.58,2363.07 3777.47,2354.18 3790.47,2354.18 3884.64,2260 3915,2260 v1(3950,2295)
  Bottom Layer w10: v1(3950,2295) 3989.37,2334.37 4058.77,2334.37 4220.9,2496.5 4220.9,2707.57 4397.71,2884.38 CN4.2
MOTO1_PWM: U1.29 U5.23 | length 608.7
  Top Layer w10: v1@3635,2445.17 3636.1,2446.27 3636.1,2516.1 3680,2560 3680,2666.77 3709.53,2696.29 U1.29
  Bottom Layer w10: 3635,2455 v1(3635,2445) 3635,2397.47 3774.6,2257.88 3814.17,2257.88 U5.23
MOTO2_1: U1.27 U5.17 | length 416.3
  Top Layer w10: v1(3710,2460) 3757.8,2507.8 3757.8,2687.39 3748.9,2696.29 U1.27
  Bottom Layer w10: v1(3710,2460) 3758.58,2411.42 3814.17,2411.42 U5.17
MOTO2_2: U1.28 U5.16 | length 386.2
  Top Layer w10: v1(3690,2515) 3707.8,2532.8 3707.8,2666.28 3729.21,2687.7 3729.21,2696.29 U1.28
  Bottom Layer w10: v1(3690,2515) 3690.36,2515 3768.34,2437.01 3814.17,2437.01 U5.16
MOTO2_A: CN5.1 U1.16 | length 647
  Top Layer w10: U1.16 3876.93,2510.79 3877.19,2510.53 3895.8,2510.53 3899.42,2506.91 3918.09,2506.91 v1(3920,2505)
  Bottom Layer w10: v1(3920,2505) 4159.69,2744.69 4159.69,2913.59 4184.36,2938.27 CN5.1
MOTO2_B: CN5.2 U1.17 | length 577.1
  Top Layer w10: U1.17 3876.93,2530.47 3878.25,2531.79 3896.79,2531.79 v1(3915,2550)
  Bottom Layer w10: v1(3915,2550) 3923.46,2550 3933.19,2559.72 4003.16,2629.69 4003.16,2835.8 4105.62,2938.27 CN5.2
MOTO2_PWM: U1.32 U5.15 | length 357.1
  Top Layer w10: U1.32 3650.47,2696.29 3655,2691.77 v1(3655,2585)
  Bottom Layer w10: v1(3655,2585) 3655.36,2585 3716.52,2523.84 3716.52,2520.68 3774.6,2462.6 3814.17,2462.6 U5.15
NetC5_2: C5.2 U1.6 Y1.2 | length 647.8
  Top Layer w10: U1.6 3670.16,2353.05 3670.47,2352.74 3670.47,2257.32 3817.79,2110 Y1.2 3855,2078.31 C5.2@3855,1888.09
NetC6_2: C6.2 U1.5 Y1.1 | length 587.8
  Top Layer w10: C6.2 3532.36,1896.95 Y1.1 3601.26,2110 3650.47,2159.21 U1.5
NetC8_2: C8.2 U1.4 Y2.1 | length 657
  Top Layer w10: C8.2 3145.63,2070.63 Y2.1 3280,2074.57 3334.74,2129.31 3334.74,2137.8 3442.37,2245.42 3523.16,2245.42 3630.79,2353.05 U1.4
NetC9_2: C9.2 U1.3 Y2.2 | length 616.5
  Top Layer w10: C9.2 3140,2208.87 3176.94,2171.93 3261.38,2171.93 Y2.2@3280,2153.31 ; Y2.2 Y2.2@3280,2153.31 ; U1.3 3611.1,2361.65 3516.24,2266.79 3393.48,2266.79 Y2.2@3280,2153.31
NetD1_2: D1.2 R2.1 | length 178.7
  Top Layer w10: D1.2 4175,1906.13 4185.88,1917.01 4285.31,1917.01 4328.99,1960.69 R2.1
NetL1_1: L1.1 U1.9 | length 584.8
  Top Layer w10: U1.9 3729.21,2361.65 3729.9,2360.96 3729.9,2349.42 3874.32,2205 v1(4075,2205) ; v1(4070,2155) 4071.91,2153.09 4092.91,2153.09 4135,2111 L1.1
  Bottom Layer w10: v1(4070,2155) 4070,2197.29 4075,2202.29 v1(4075,2205)
NetR18_2: pad.3 R18.2 U1.20 | length 341.2
  Top Layer w10: U1.20 3876.93,2589.53 3878.56,2587.9 3905.18,2587.9 3913.27,2579.81 3920.54,2579.81 3940,2560.36 3940,2542.11 3979,2503.11 3989.43,2503.11 3995.5,2497.04 4021.57,2523.11 4081.89,2523.11 pad.3
NetR19_1: pad.2 R19.1 U1.44 | length 390.4
  Top Layer w10: R19.1 3245,2694.31 pad.2 ; R19.1@3245,2693.18 3255.19,2682.99 3320.53,2682.99 3472.36,2531.16 3482.38,2531.16 3483.07,2530.47 U1.44
NRST: C7.2 R1.1 S1.1 U1.7 | length 1272.6
  Top Layer w10: U1.7 3689.84,2361.65 3690.47,2361.02 3690.47,2360.56 3871.04,2180 4138.87,2180 4288.87,2330 R1.1 4290,2481.89 S1.1 4295,2506.57 4280.31,2521.26 4183.74,2521.26 v1(4150,2555) ; C7.2 4126.13,2655.69 4145.09,2674.65 4151.52,2674.65 v1(4153.43,2676.57)
  Bottom Layer w10: v1(4150,2555) 4151.72,2556.72 4151.72,2674.85 v1(4153.43,2676.57)
OUT1_1: CN10.1 U5.1 U5.2 | length 1421.6
  Bottom Layer w30: U5.1@3546.52,2231.46 U5.2@3546.52,2250 ; 3554.35,2223.62 3590,2187.97 3590,2175.5 3645.5,2120 4093.24,2120 4230.46,2257.22 4230.46,2356.85 4367.67,2494.07 4506.49,2494.07 4521.14,2479.42 4521.14,2415.32 4476.45,2370.64 CN10.1
OUT1_2: CN10.2 U5.5 U5.6 | length 1710.6
  Bottom Layer w30: 3514.13,2351.58 3504.16,2351.58 3474.13,2321.55 3474.13,1983.32 3614.46,1842.99 3872.8,1842.99 4270.46,2240.65 4270.46,2322.12 4397.71,2449.38 CN10.2
OUT2_1: CN11.1 U5.11 U5.12 | length 1811.8
  Bottom Layer w30: 3514.13,2505.12 3470.62,2505.12 3394.13,2428.63 3394.13,1950.18 3581.32,1762.99 4250.06,1762.99 4397.71,1910.64 CN11.1
OUT2_2: CN11.2 U5.7 U5.8 | length 1626.1
  Bottom Layer w30: 3514.13,2402.76 3498.77,2402.76 3434.13,2338.12 3434.13,1966.75 3597.89,1802.99 4211.32,1802.99 4397.71,1989.38 CN11.2
RES: OLED_SPI.6 U1.26 | length 556.3
  Top Layer w10: OLED_SPI.6 3356.89,2913.71 3385.6,2885 3395.36,2885 3462.36,2817.99 3708.94,2817.99 3768.58,2758.35 U1.26
STBY: U1.33 U5.19 | length 483.1
  Top Layer w10: v1(3612,2548.71) 3612,2551.41 3625,2564.41 3625,2690.51 3630.79,2696.29 U1.33
  Bottom Layer w10: v1(3612,2548.71) 3685,2475.71 3685,2449.64 3774.41,2360.24 3814.17,2360.24 U5.19
TCK: SWD.4 U1.37 | length 475.2
  Top Layer w10: v1(3340,2865) 3340,2839.33 3425.99,2753.34 3427.6,2753.34 U1.37
  Bottom Layer w10: v1(3340,2865) 3383.74,2908.74 3494.18,2908.74 3506.9,2921.46 SWD.4
TMS: SWD.3 U1.34 | length 540.2
  Top Layer w10: v1(3385,2860) 3447.01,2797.99 3570.05,2797.99 3611.1,2756.94 U1.34
  Bottom Layer w10: v1(3385,2860) 3524.17,2860 3585.63,2921.46 SWD.3
UART_RX: CN6.1 U1.13 | length 1335.1
  Top Layer w10: CN6.1 3259.36,1711.97 3374.74,1827.35 3374.74,2121.23 3443.51,2190 v1(3625,2190) ; U1.13 3848.32,2450.73 3848.32,2381.68 v1(3920,2310)
  Bottom Layer w10: v1(3625,2190) 3726.36,2190 3731.36,2185 3861.99,2185 3915,2238.01 3915,2269.19 3920,2274.19 v1(3920,2310)
UART_TX: CN6.2 U1.12 | length 1333.1
  Top Layer w10: CN6.2 3180.62,1711.97 3354.74,1886.09 3354.74,2129.51 3435.23,2210 3589.46,2210 v1(3614.46,2235) ; U1.12 3895,2285.95 v1(3895,2285)
  Bottom Layer w10: v1(3614.46,2235) 3706.82,2235 3731.82,2210 3734.64,2210 3739.64,2205 3853.71,2205 3895,2246.29 v1(3895,2285)
USART1_RX: CN7.1 U1.31 | length 993.4
  Top Layer w10: v1(3655,2790) 3655,2787.29 3669.41,2772.88 3669.41,2757.68 3670.16,2756.93 U1.31
  Bottom Layer w10: CN7.1 3010.44,3104.36 2975.75,3069.68 2975.75,2999.72 3135.47,2840 3369.64,2840 3374.64,2835 3610,2835 v1(3655,2790)
USART1_TX: CN7.2 U1.30 | length 876.3
  Top Layer w10: U1.30 3689.84,2756.93 3691.16,2758.25 3691.16,2759.67 3698.09,2766.59 3698.09,2788.09 v1(3700,2790)
  Bottom Layer w10: CN7.2 3078.94,3025.62 3117.3,2987.25 3607.97,2987.25 3631.65,2963.57 3631.65,2858.35 v1(3700,2790)
VCC: C17.1 C20.1 C21.1 CN2.1 CN3.1 CN8.1 CN9.2 OLED_IIC.2 U2.3 U5.20 | length 4672.9
  Top Layer w15: U2.3 2990.55,1838.27 3002.34,1826.48 3107.13,1826.48 C17.1 3110,1814.53 3168.57,1755.96 3179.04,1755.96 v1(3180,1755) ; v1(3984.16,1724.16) 4009.21,1749.21 4317.12,1749.21 4354.36,1711.97 CN3.1 ; v1(4134.69,2855) 4134.69,2856.35 4150.77,2872.44 4150.77,2927.35 OLED_IIC.2
  VCC w15: v1(3180.64,2023.07) 3180.64,2064.54 v1(3611.1,2495) ; v1(3984.16,1724.16) 3984.16,2153.05 4063.61,2232.5 4086.39,2232.5 4089.89,2229 v1@4097.75,2229 ; v1@4105,2227.31 4105,2825.31 v1(4134.69,2855)
  Bottom Layer w15: CN9.2 3095.75,2037.68 CN9.2@3110.36,2023.07 ; v1@3180.32,1754.68 3180.32,1712.29 CN2.1@3180.64,1711.97 ; CN2.1 CN2.1@3180.64,1711.97 ; v1(3180.64,2023.07) CN9.2@3110.36,2023.07 ; v1(3611.1,2495) 3612.06,2494.04 3627.78,2494.04 3662.5,2459.32 3662.5,2440.32 3768.67,2334.15 3814.67,2334.15 U5.20 ; v1(3984.16,1724.16) 3855.99,1595.99 3761.58,1595.99 3724.34,1633.23 CN8.1 3724.34,1711.97 3712.16,1724.16 3486.16,1724.16 3440.32,1770 3214.32,1770 ; v1(4105,2225) 4103.65,2225 4096.15,2232.5 4039.5,2232.5 C20.1 4041.12,2263.13 4166.99,2263.13 4178.87,2275 C21.1 ; CN9.2@3110.36,2023.07 3141.2,1992.23 3156.66,1992.23 3187.5,1961.39 3187.5,1796.83 3214.32,1770 ; CN2.1@3180.64,1711.97 3214.32,1745.66 3214.32,1770
VDD: C1.2 C11.2 C12.2 C13.2 C14.2 C18.1 D1.1 L1.2 OLED_SPI.3 R1.2 SWD.1 U1.1 U1.24 U1.36 U1.48 U2.2 U2.4 U3.3 | length 6475.2
  Top Layer w12: C18.1 2862.26,2263.65 2871.35,2263.65 2927.7,2320 v1(2976.39,2320) ; C18.1@2872.15,2262.85 2872.15,2092.85 U2.4 ; v1(2900,1745) U2.2 ; U3.3 3225.27,2518.64 3283.62,2518.64 v1(3285,2517.27) ; v1(3330,2320) 3330.34,2320.34 3374.66,2320.34 C14.2 3376.13,2320.69 3504.86,2449.42 3514.99,2449.42 U1.1 ; v1(3462.78,1795) 4006.82,1795 4125.45,1913.63 4125.45,2039.45 4195,2109 4195,2111 4280,2196 4280,2260.81 4289.88,2270.69 R1.2 ; C11.2 3564.41,2854.41 3564.41,2885.01 3593.11,2913.71 OLED_SPI.3 3592.57,2963.46 v1(3592.57,3060) ; v1(3570,2680) 3570,2708.09 3571.73,2709.82 U1.36 ; U1.24@3865.14,2668.58 3896.79,2700.24 3943.3,2700.24 C1.2 v1(3953.06,2758.35) ; C13.2 4136.13,2270.69 4200,2334.56 v1(4200,2400) ; L1.2@4204.81,2119.81 4212.1,2112.53 4233.47,2112.53 v1(4235,2111)
  VCC w12: v1(2900,1745) 2950,1795 v1(3462.78,1795) ; v1(2976.39,2320) 3315,2320 3320,2325 ; v1(3285,2517.27) 3285,2443.38 3338.38,2390 ; v1(3330,2320) 3330,2351.89 3338.38,2360.27 3338.38,2390 ; v1(3570,2680) 3555,2665 ; v1(3953.06,2758.35) 3900,2811.41 ; v1(4235,2111) 4200,2146 4200,2826.46 4145.46,2881 3969.59,2881 3900,2811.41 ; 3338.38,2390 3555,2606.62 3555,2665 ; 3555,2665 3549,2671 3549,3016.43 v1(3592.57,3060) 3841.17,2811.41 3900,2811.41
  Bottom Layer w12: v1(3592.57,3060) 3636.06,3060 3743.11,2952.95 SWD.1
pads on no net: CN8.4 CN9.4 OLED_SPI.1 U1.2 U1.19 U1.38 U1.39 U1.40 U3.5 U3.8

## Polygon pours and split planes (outlines as drawn)
GND on GND "GND_L02_P000" (solid, remove dead copper, pour order 0): 2739.98,1500 2739.98,1500.05 2739.99,3182.12 cw(c2868.9,3186.11) 2864.84,3315.02 cw(c2865,3310.01) 2865.04,3315.02 4610,3312.18 cw(c4609.99,3307.17) 4610.13,3312.18 cw(c4606.41,3183.58) 4732.45,3209.37 cw(c4730,3205) 4735.02,3205 4735.02,3187.23 cw(c4606.41,3183.58) 4735.07,3183.58 cw(c4606.41,3183.58) 4735.02,3179.93 4735.02,1500.05 cw(c4607.5,1497.5) 4735.04,1497.5 cw(c4607.5,1497.5) 4610.1,1369.99 cw(c4610,1375) 4610,1369.98 2865.03,1369.98 cw(c2865,1375) 2864.9,1369.99 cw(c2867.5,1497.5) 2739.98,1500.05 cw(c2867.5,1497.5)
GND on Top Layer "GND_L01_P001" (solid, remove dead copper, pour order 1): 2739.98,1500 2739.98,1500.05 2739.99,3182.12 cw(c2868.9,3186.11) 2864.84,3315.02 cw(c2865,3310.01) 2865.04,3315.02 4610,3312.18 cw(c4609.99,3307.17) 4610.13,3312.18 cw(c4606.41,3183.58) 4732.45,3209.37 cw(c4730,3205) 4735.02,3205 4735.02,3187.23 cw(c4606.41,3183.58) 4735.07,3183.58 cw(c4606.41,3183.58) 4735.02,3179.93 4735.02,1500.05 cw(c4607.5,1497.5) 4735.04,1497.5 cw(c4607.5,1497.5) 4610.1,1369.99 cw(c4610,1375) 4610,1369.98 2865.03,1369.98 cw(c2865,1375) 2864.9,1369.99 cw(c2867.5,1497.5) 2739.98,1500.05 cw(c2867.5,1497.5)
GND on Bottom Layer "GND_L04_P002" (solid, remove dead copper, pour order 2): 2739.98,1500 2739.98,1500.05 2739.99,3182.12 cw(c2868.9,3186.11) 2864.84,3315.02 cw(c2865,3310.01) 2865.04,3315.02 4610,3312.18 cw(c4609.99,3307.17) 4610.13,3312.18 cw(c4606.41,3183.58) 4732.45,3209.37 cw(c4730,3205) 4735.02,3205 4735.02,3187.23 cw(c4606.41,3183.58) 4735.07,3183.58 cw(c4606.41,3183.58) 4735.02,3179.93 4735.02,1500.05 cw(c4607.5,1497.5) 4735.04,1497.5 cw(c4607.5,1497.5) 4610.1,1369.99 cw(c4610,1375) 4610,1369.98 2865.03,1369.98 cw(c2865,1375) 2864.9,1369.99 cw(c2867.5,1497.5) 2739.98,1500.05 cw(c2867.5,1497.5)

## Other copper
Top Layer:
  pour cut-out: 3825,2708.09 3825,2411.36 3819.9,2416.45 3530,2416.45 3530,2708.09
  region: 3605,2380

## Silkscreen, mask and mechanical layers (free items; w line width, h text height)
Top Overlay:
  text "X" at 3845,2915 h39.37 r90
  text "TX2" at 3205,1780 h39.37 r90
  text "RX2" at 3288.15,1780 h39.37 r90
  text "GND" at 4195,1770 h39.37
  text "VCC" at 4345,1770 h39.37
Bottom Overlay:
  text "RX1" at 3255,3090 h39.37
  text "TX1" at 3260,3020 h39.37
  text "M1_B" at 4365,2870 h39.37
  text "M1_A" at 4363.41,2800 h39.37
  text "M2_B" at 4089.93,2730 h39.37 r270
  text "M2_A" at 4169,2725 h39.37 r270
  text "CAN_H" at 3337.8,2580.6 h39.37
  text "CAN_L" at 3338.84,2495 h39.37
  text "OUT1" at 4360,2393.8 h39.37
  text "GND" at 3277.2,2100 h39.37
  text "VCC" at 3292.8,2020 h39.37
  text "DUOJI_PWM" at 3483.17,1939.42 h39.37
  text "OUT2" at 4358.84,1930 h39.37
  text "GND" at 4375,1870 h39.37 r90
  text "VCC" at 3200,1865.58 h39.37 r90
  text "GND" at 3290,1860 h39.37 r90
  text "GND" at 3831.69,1855 h39.37 r90
  text "9V" at 4300,1830 h39.37 r90
  text "VCC" at 3571.98,1685.6 h39.37 r180
Mechanical 1:
  lines w10: 2739.98,1500 2739.98,1500.05 ; 2739.99,1500.1 ccw(c2867.5,1497.5) 2739.98,1500.05 ; 2739.98,1500.05 ccw(c2867.5,1497.5) 2864.9,1369.99 ; 2739.98,1500.05 2739.99,3182.12 cw(c2868.9,3186.11) 2864.84,3315.02 cw(c2865,3310.01) 2865.04,3315.02 4610,3312.18 cw(c4609.99,3307.17) 4610.13,3312.18 cw(c4606.41,3183.58) 4732.45,3209.37 cw(c4730,3205) 4735.02,3205 4735.02,3187.23 cw(c4606.41,3183.58) 4735.07,3183.58 cw(c4606.41,3183.58) 4735.02,3179.93 4735.02,1500.05 cw(c4607.5,1497.5) 4735.04,1497.5 cw(c4607.5,1497.5) 4610.1,1369.99 ; 2864.9,1369.99 ccw(c2865,1375) 2865.03,1369.99 4610,1369.98 ccw(c4610,1375) 4610.1,1369.99 ; 2864.9,1369.99 2864.9,1369.99 ; 4610.1,1369.99 4610.1,1369.99